# Altium PCB PCB3.PcbDoc (part 2 of 4)
Units mm, origin at the board's own origin, x right, y up, seen from the top; angles counter-clockwise.
Board outline 160 x 194 mm, 2 copper layers (Top Layer, Bottom Layer); 456 components, 297 nets, 1240 pads, 521 vias.
Unrouted connection lines stored in the file: 258.
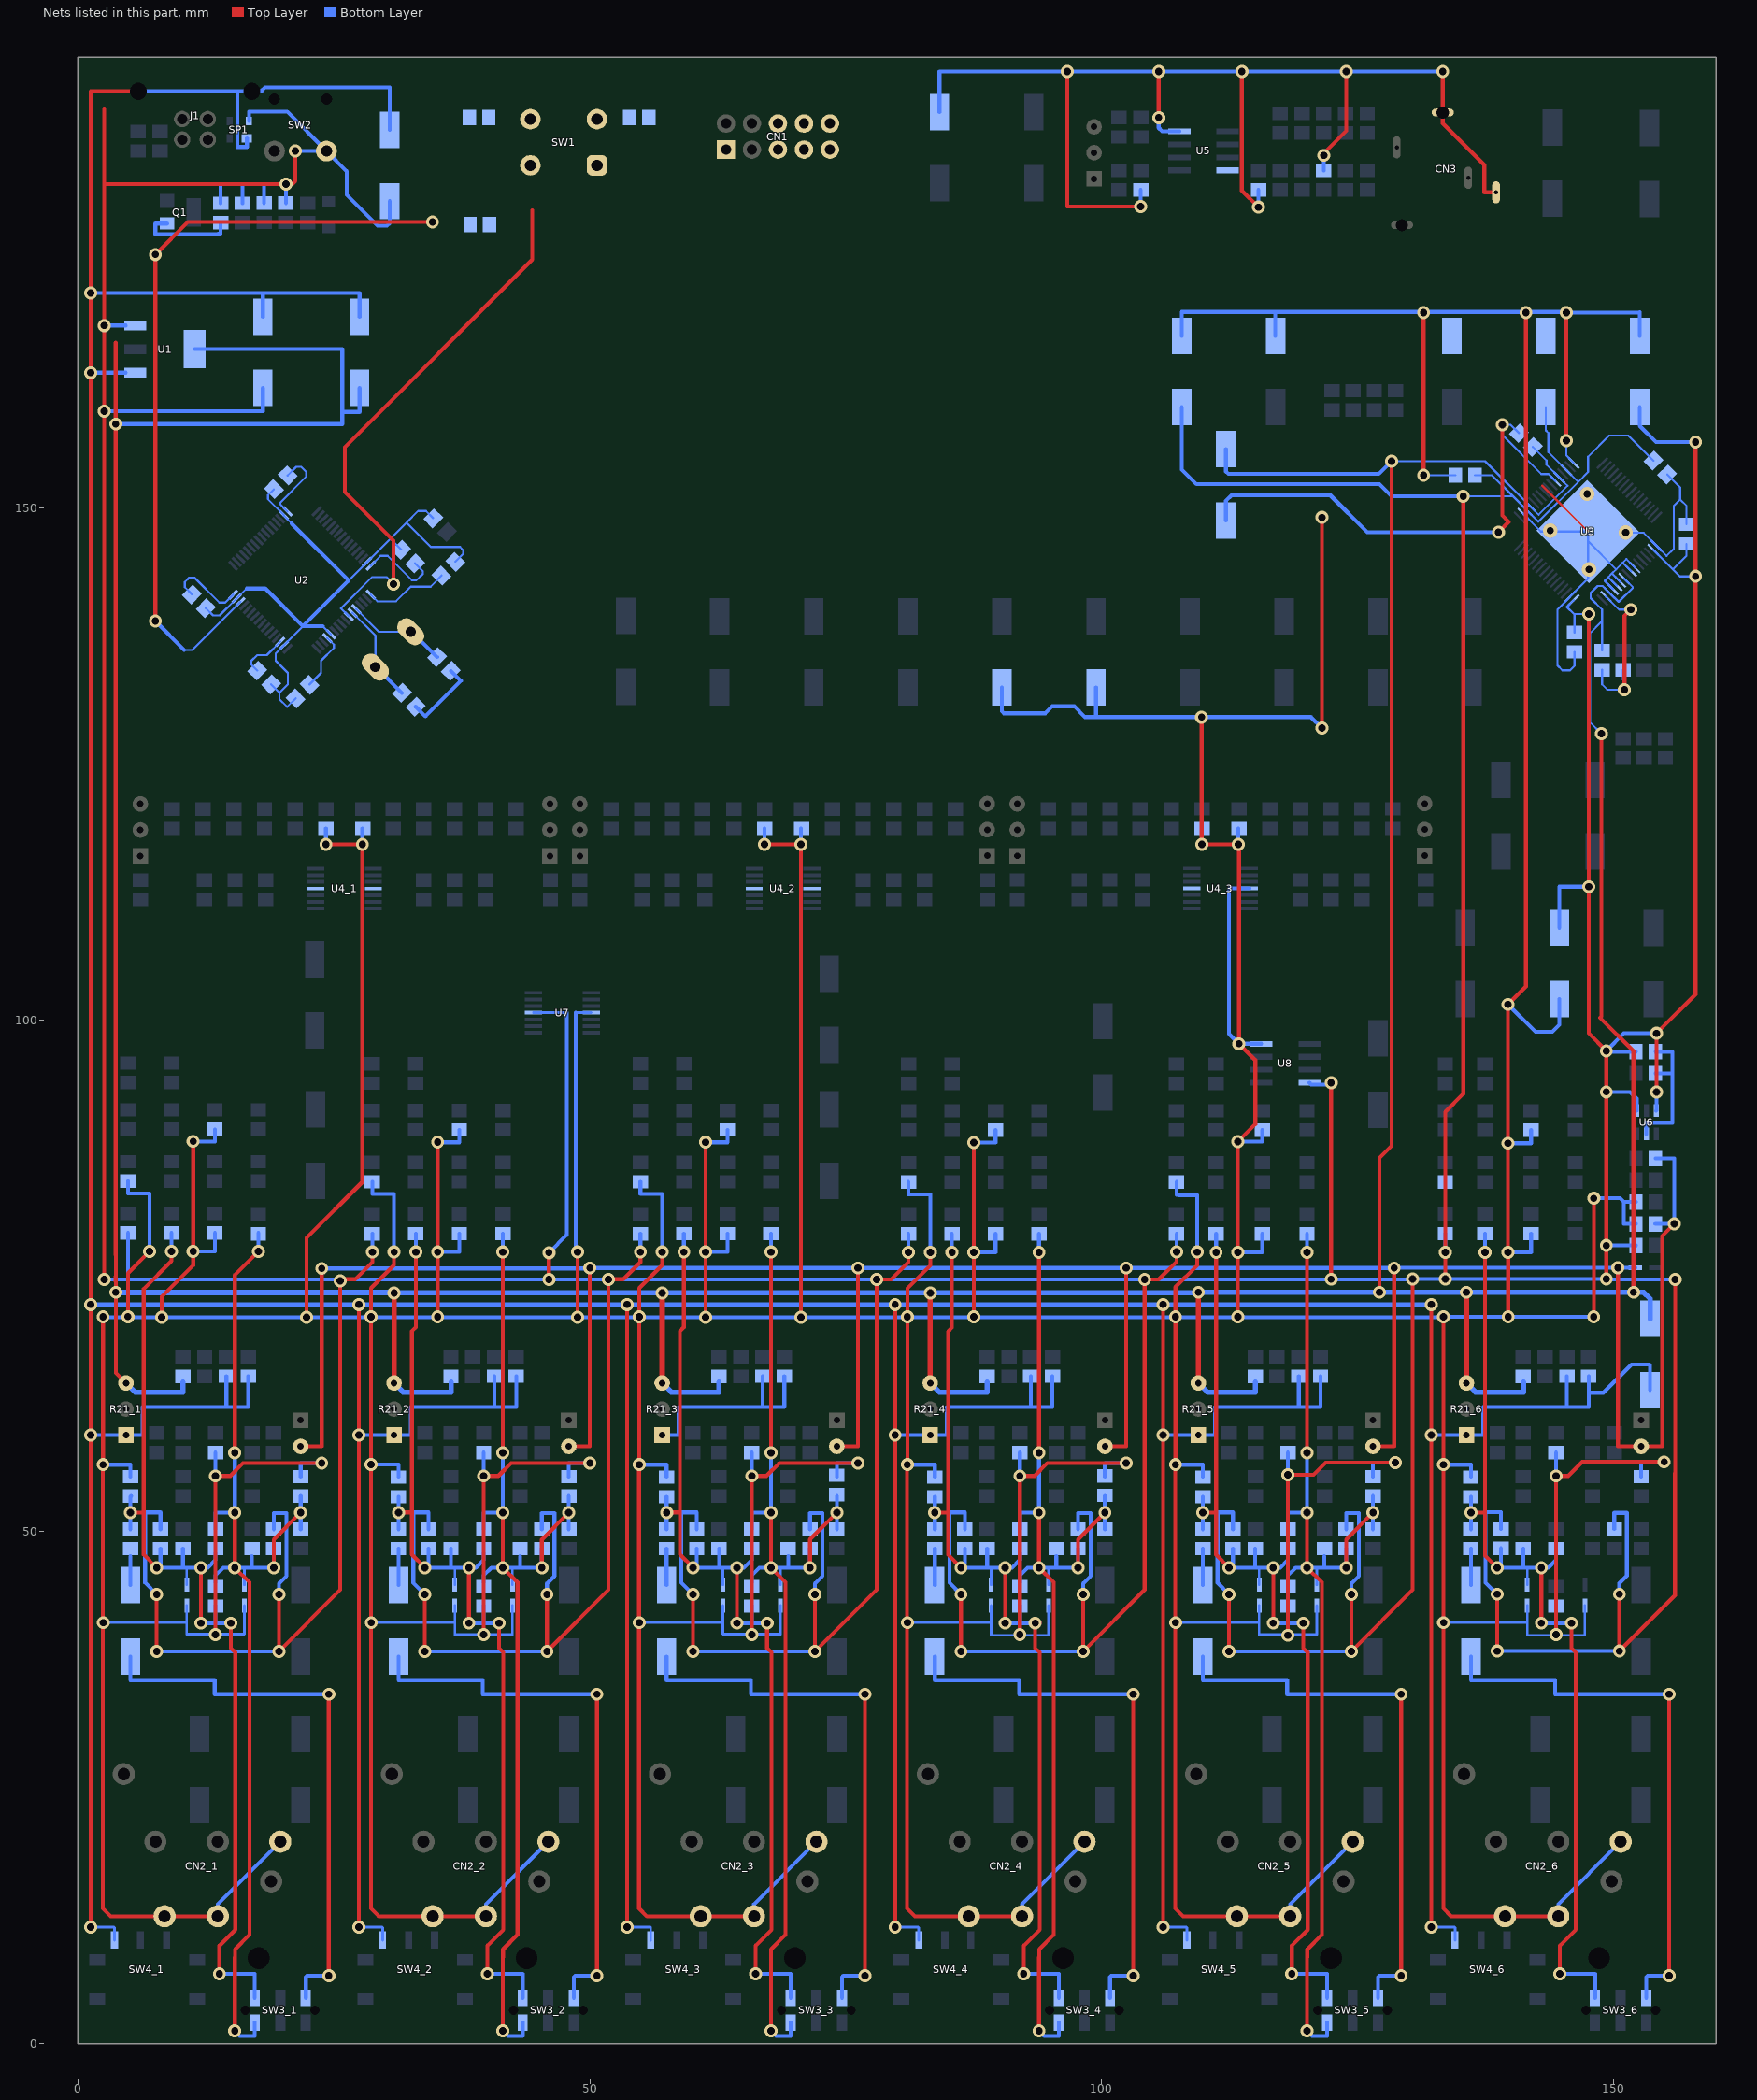
[diagram p2: the nets of this part, all layers, seen from the top]

## Part data
B1: "Conecta distintos planos de masa por una pista"
C3 C4 C5 C6 C7 C8 C9 C10 C11 C12 C13 C15 C17_1 C17_2 C17_3 C17_4 C17_5 C17_6 C21 C22 C25 C26 C29 C30 C49_1 C49_2 C49_3 C49_4 C49_5 C49_6 C50_1 C50_2 C50_3 C50_4 C50_5 C50_6 C51_1 C51_2 C51_3 C52_1 C52_2 C52_3 C53_1 C53_2 C53_3 C54_1 C54_2 C54_3 C55_1 C55_2 C55_3 C56_1 C56_2 C56_3 C59_1 C59_2 C59_3 C60_1 C60_2 C60_3 C61 C63 C66 C68 C69 C70 C71 C72 C73 C74 C75 C76 C77 C78 C79 C80 C81 C82 C83 C84 C85 C86 C87 C88 C89_1 C89_2 C89_3 C89_4 C89_5 C89_6 C90_1 C90_2 C90_3 C90_4 C90_5 C90_6 C91_1 C91_2 C91_3 C91_4 C91_5 C91_6 C92_1 C92_2 C92_3 C92_4 C92_5 C92_6 C93_1 C93_2 C93_3 C93_4 C93_5 C93_6: "Capacitor de placas paralelas", tolerancia=X7R, Encapsulado=0805, tension=25V, Valor=100nF
CN1: "STLINK V2 Mini"
D1: library part Led, Color=Verde, Cod. Proveedor=67-1549-1-ND, Encapsulado=SMD, Link=https://www.digikey.com/product-detail/es/SML-LX0603GW-TR/67-1549-1-ND/304360?utm_campaign=buynow&WT.z_cid=ref_octopart_dkc_buynow&utm_medium=aggregator&curr=usd&site=us&utm_source=octopart, Proveedor=Digi-Key
D2 D3_1 D3_2 D3_3 D3_4 D3_5 D3_6 D4_1 D4_2 D4_3 D4_4 D4_5 D4_6: library part "Schottky Diode", Cod. Proveedor=1727-5845-1-ND, Encapsulado=SOD-128, Fabricante=Nexperia, Link=https://www.digikey.com/product-detail/es/PMEG6010EP,115/1727-5845-1-ND/2697507?utm_campaign=buynow&WT.z_cid=ref_octopart_dkc_buynow&utm_medium=aggregator&curr=usd&site=us&utm_source=octopart, Proveedor=Digi-Key
J1: "Conector micro USB tipo B", Cod. Proveedor=CO4821095, Encapsulado="SMD B TYPE SIDE ENTRY", Proveedor=Elemon
L1: library part Inductor, Cod. Proveedor=478-7137-1-ND, Encapsulado=SMD, Fabricante="AVX Corporation", Link=https://www.digikey.com/product-detail/es/L0201R68AHSTR/500/478-7137-1-ND/3455469?utm_campaign=buynow&WT.z_cid=ref_octopart_dkc_buynow&utm_medium=aggregator&curr=usd&site=us&utm_source=octopart, Proveedor=Digi-Key, Valor=0.68nH
Q1: library part NPN, "NPN", Cod. Proveedor=1727-2918-1-ND, Encapsulado=TO-236AB, Fabricante="Nexperia USA Inc.", Link=https://www.digikey.com/products/es?keywords=1727-2918-1-ND, Proveedor=Digi-Key
R1 R8_1 R8_2 R8_3 R8_4 R8_5 R8_6 R9_1 R9_2 R9_3 R9_4 R9_5 R9_6 R10_1 R10_2 R10_3 R10_4 R10_5 R10_6 R24_1 R24_2 R24_3 R25_1 R25_2 R25_3 R26_1 R26_2 R26_3 R27_1 R27_2 R27_3 R28_1 R28_2 R28_3 R29_1 R29_2 R29_3 R30_1 R30_2 R30_3 R31_1 R31_2 R31_3 R34_1 R34_2 R34_3 R35_1 R35_2 R35_3 R36_1 R36_2 R36_3 R37_1 R37_2 R37_3 R38 R39 R40 R41 R42 R43 R44 R45 R46 R47 R48 R50 R75 R78 R81 R82 R83 R84 R85 R86 R87 R88 R89 R92 R93 R94 R95 R96 R97 R98 R99 R100 R103 R104 R105 R106 R107 R108 R109 R110 R111 R114 R115 R116 R117 R118 R119 R120 R121 R122 R125 R126 R127 R128 R129 R130 R131 R132 R133 R136 R137 R138 R139 R140 R141 R142 R143: "Resistencia", tolerancia=10%, Potencia=1/4W
  R1: Valor=10K
  R8_1 R8_2 R8_3 R8_4 R8_5 R8_6 R34_1 R34_2 R34_3 R35_1 R35_2 R35_3 R39 R43 R47 R81 R85 R92 R97 R103 R107 R114 R118 R125 R129 R136 R140: Valor=1K
  R9_1 R9_2 R9_3 R9_4 R9_5 R9_6: Valor=15K
  R10_1 R10_2 R10_3 R10_4 R10_5 R10_6: Valor=8K2
  R24_1 R24_2 R24_3 R25_1 R25_2 R25_3 R28_1 R28_2 R28_3 R29_1 R29_2 R29_3 R30_1 R30_2 R30_3 R31_1 R31_2 R31_3: Valor=1K5
  R26_1 R26_2 R26_3 R27_1 R27_2 R27_3 R36_1 R36_2 R36_3 R37_1 R37_2 R37_3 R84 R95 R106 R117 R128 R139: Valor=47
  R38 R48 R78 R88 R89 R96 R100 R110 R111 R121 R122 R132 R133 R143: Valor=5K6
  R40 R44 R82 R86 R93 R98 R104 R108 R115 R119 R126 R130 R137 R141: Valor=6K8
  R41 R45: Valor=360R
  R42: Valor=4K7
  R46: Valor=47R
  R50: Valor=100R
  R75: Valor=1M
  R83 R87 R94 R99 R105 R109 R116 R120 R127 R131 R138 R142: Valor=360
R2 R3 R4 R5 R6 R7 R11 R22_1 R22_2 R22_3 R22_4 R22_5 R22_6 R23_1 R23_2 R23_3 R23_4 R23_5 R23_6 R51 R52 R53 R54 R55 R56 R57 R58 R59 R60 R61 R62 R63 R64 R65 R66 R67 R68 R69 R70 R71 R72 R73 R74 R76 R77 R79 R80 R90 R91 R101 R102 R112 R113 R123 R124 R134 R135 R144_1 R144_2 R144_3 R144_4 R144_5 R144_6 R145_1 R145_2 R145_3 R145_4 R145_5 R145_6 R146_1 R146_2 R146_3 R146_4 R146_5 R146_6 R147_1 R147_2 R147_3 R147_4 R147_5 R147_6: "Resistencia", tolerancia=5%
  R2: Potencia=1/10W, Valor=330R
  R3: Potencia=1/10W, Valor=47k
  R4 R5 R6 R7: Potencia=1/10W, Valor=22R
  R11: Potencia=1/10W, Valor=220K
  R22_1 R22_2 R22_3 R22_4 R22_5 R22_6 R144_1 R144_2 R144_3 R144_4 R144_5 R144_6 R147_1 R147_2 R147_3 R147_4 R147_5 R147_6: Potencia=1/4W, Valor=1K
  R23_1 R23_2 R23_3 R23_4 R23_5 R23_6: Potencia=1/4W, Valor=15K
  R51 R52 R53 R54 R55 R56 R57 R58 R59 R60 R61 R62 R63 R64 R65 R66 R67 R68 R69 R70 R71 R72 R73 R74 R79 R80 R90 R91 R101 R102 R112 R113 R123 R124 R134 R135: Potencia=1/4W, Valor=1M
  R76: Potencia=1/4W, Valor=33K
  R77: Potencia=1/4W, Valor=1K8
  R145_1 R145_2 R145_3 R145_4 R145_5 R145_6: Potencia=1/4W, Valor=6K8
  R146_1 R146_2 R146_3 R146_4 R146_5 R146_6: Potencia=1/4W, Valor="6 K8"
R12 R13 R14 R15 R16 R17 R18 R19 R20: "Resistencia", Potencia=1/10W, Valor=100R
R21_1 R21_2 R21_3 R21_4 R21_5 R21_6 R32_1 R32_2 R32_3 R33_1 R33_2 R33_3 R49: library part Potenciometer, tolerancia=10%, Potencia=1/4W, Valor=10K
SP1: library part "Double ESD", "Double rail-to-rail ESD protection diode", Cod. Proveedor=1727-3884-1-ND, Encapsulado=SOT-143B, Link=https://www.digikey.com/product-detail/es/PRTR5V0U2X,215/1727-3884-1-ND/1589981?utm_campaign=buynow&WT.z_cid=ref_octopart_dkc_buynow&utm_medium=aggregator&curr=usd&site=us&utm_source=octopart, Proveedor=Digi-Key
SW1 SW5_1 SW5_2 SW5_3 SW5_4 SW5_5 SW5_6: "Pulsador de 4 pines"
  SW5_1 SW5_2 SW5_3 SW5_4 SW5_5 SW5_6: Cod. Proveedor=GH1365-ND, Encapsulado="Montaje en panel, posterior", Fabricante="Grayhill Inc.", Link=https://www.digikey.com/product-detail/es/30-3/GH1365-ND/686796?utm_campaign=buynow&WT.z_cid=ref_octopart_dkc_buynow&utm_medium=aggregator&curr=usd&site=us&utm_source=octopart, Proveedor=Digi-Key
SW4_1 SW4_2 SW4_3 SW4_4 SW4_5 SW4_6: library part SWITCH_3, "Pulsador de 4 pines", Cod. Proveedor=563-1246-1-ND, Encapsulado=SMD, Fabricante="Nidec Copal Electronics", Link=https://www.digikey.com/product-detail/en/nidec-copal-electronics/CFPA-1FB4-A2T/563-1246-1-ND/2357767, Proveedor=Digi-Key
U1: "LDO Regulator", Cod. Proveedor=LM1117IMP-ADJ/NOPBCT-ND, Encapsulado=SOT-223-4, Fabricante="Texas Instruments", Link=https://www.digikey.com/product-detail/es/LM1117IMP-ADJ-NOPB/LM1117IMP-ADJ-NOPBCT-ND/483060?utm_campaign=buynow&WT.z_cid=ref_octopart_dkc_buynow&utm_medium=aggregator&curr=usd&site=us&utm_source=octopart, Proveedor=Digi-Key
U2: library part STM32F4xxR2, Manufacturer=STMicroelectronics, Manufacturer_Part_Number=stm32f4xxr2, _BOOT0="conectado a VDD o DGND a traves de R=10K", _BOOT0=0="0: Main Flash memory is selected as boot space", _BOOT0=1="1: System memory is selected as boot space", _VDD="Capa de 100nF", Cod. Proveedor=497-17428-ND, Encapsulado=64-LQFP, Link=https://www.digikey.com/product-detail/es/STM32F401RBT6/497-17428-ND/4755972?utm_campaign=buynow&WT.z_cid=ref_octopart_dkc_buynow&utm_medium=aggregator&curr=usd&site=us&utm_source=octopart, Proveedor=Digi-Key, Vendor=STMicroelectronics
U3: library part PCM3168A-Q1_PAP_, Manufacturer="Texas Instruments", Manufacturer_Part_Number=PCM3168A-Q1_PAP_64, Vendor="Texas Instruments"
U4_1 U4_2 U4_3 U7: library part Opamp_x4, "Integrado con 4 operacionales", Cod. Proveedor=296-22024-1-ND, Encapsulado=8-SOIC, Fabricante="Texas Instruments", Link=https://www.digikey.com/product-detail/es/OPA2134UA-2K5/296-22024-1-ND/301154?utm_campaign=buynow&WT.z_cid=ref_octopart_dkc_buynow&utm_medium=aggregator&curr=usd&site=us&utm_source=octopart, Proveedor=Digi-Key
U5: "Integrado con 2 operacionales"
U6: "Low IQ Boost/SEPIC/Inverting Converter with 1A, 60V Switch", Cod. Proveedor=LT8330ES6#TRMPBFCT-ND, Encapsulado=TSOT-23-6, Fabricante="Linear Technology/Analog Devices", Link=https://www.digikey.com/product-detail/es/LT8330ES6%2523TRMPBF/LT8330ES6%2523TRMPBFCT-ND/5361671?utm_campaign=buynow&WT.z_cid=ref_octopart_dkc_buynow&utm_medium=aggregator&curr=usd&site=us&utm_source=octopart, Proveedor=Digi-Key
U8: library part Opamp_x2, "Integrado con 2 operacionales", Cod. Proveedor=296-22024-1-ND, Encapsulado=8-SOIC, Fabricante="Texas Instruments", Link=https://www.digikey.com/product-detail/es/OPA2134UA-2K5/296-22024-1-ND/301154?utm_campaign=buynow&WT.z_cid=ref_octopart_dkc_buynow&utm_medium=aggregator&curr=usd&site=us&utm_source=octopart, Proveedor=Digi-Key
Y1: "Resonador cerámico", frecuencia=8MHZ
C1 C2 C14 C16_1 C16_2 C16_3 C16_4 C16_5 C16_6 C18_1 C18_2 C18_3 C18_4 C18_5 C18_6 C19 C20 C23 C24 C27 C28 C31 C32 C33 C34 C35 C36 C37 C38 C39 C40 C41 C42 C43 C44 C45 C46 C47_1 C47_2 C47_3 C47_4 C47_5 C47_6 C48_1 C48_2 C48_3 C48_4 C48_5 C48_6 C57_1 C57_2 C57_3 C58_1 C58_2 C58_3 C62 C64 C65 C67: tension=16V, Valor=10uF
SW2: Cod. Proveedor=EG2615-ND, Encapsulado=SMD, Fabricante=E-Switch, Link=https://www.digikey.com/product-detail/en/e-switch/800SP9B6M6RE/EG2615-ND/502079, Proveedor=Digi-Key
SW3_1 SW3_2 SW3_3 SW3_4 SW3_5 SW3_6: Cod. Proveedor=CKN10722TR-ND, Encapsulado=SMD, Fabricante=C&K, Link=https://www.digikey.com/product-detail/en/c-k/JS202011JAQN/CKN10722TR-ND/6137629, Proveedor=Digi-Key

## Via types
v1: diameter 1.27, hole 0.711, Top Layer to Bottom Layer, 517 vias
v2: diameter 1.4, hole 0.7, Top Layer to Bottom Layer, 4 vias

## Nets (pads, with @x,y where several pads share a name; then routed paths per layer and width w, separated by ;. In a path a pad name is that pad's centre, name@x,y a point inside that pad or via, vN(x,y) a via of type N, cw(c..) or ccw(c..) an arc to the next point about the centre after c; other vN are vias at no path point)
3V3_D: C2.1 C3.1 C4.1 C7.1 C8.1 C9.1 C10.1 C20.1 C22.1 C24.1 C26.1 CN1.7 CN1.8 R21_1.3 R21_2.3 R21_3.3 R21_4.3 R21_5.3 R21_6.3 R22_1.2 R22_2.2 R22_3.2 R22_4.2 R22_5.2 R22_6.2 U1.4 U2.1 U2.13 U2.19 U2.32 U2.48 U2.64 U3.4 U3.12 U3.42 U3.46 | length 639.3
  Top Layer w0.381: 3.687,74.451 3.687,74.911 3.705,74.928 3.705,79.371 3.687,79.388 ; 3.688,74.5 3.688,73.374 3.688,65.517 R21_1.3@4.687,64.518 ; 3.687,77.063 3.688,166.125 ; v1(127.125,73.375) 127.125,86.5 128.312,87.687 v1(128.312,154.563) ; v1(148.812,127.937) 148.812,100.312 148.688,100.187 151.937,96.938 v1(151.937,73.375)
  Top Layer w0.508: R21_2.3@30.875,64.518 v1(30.875,73.313) ; R21_3.3@57.062,64.518 v1(57.062,73.323) ; R21_4.3@83.25,64.518 v1(83.25,73.323) ; R21_5.3@109.437,64.518 v1(109.437,73.375) ; R21_6.3@135.625,64.518 v1(135.625,73.375)
  Bottom Layer w0.203: C8.1@11.141,141.547 10.438,142.25 10.438,142.75 10.875,143.187 11.375,143.187 13.812,140.75 14.386,140.75 U2.32@15.16,141.523 ; C4.1@17.516,134.109 16.937,134.688 16.937,135.062 17.5,135.625 18.454,135.625 U2.19@19.756,136.927 ; U2.48@20.463,149.655 19.75,150.368 19.75,150.5 22.313,153.063 22.313,153.5 21.813,154 21.312,154 C9.1@20.484,153.172 ; C7.1@22.609,132.734 23.75,133.875 23.75,135.063 25,136.313 25,136.633 U2.13@24.352,137.281 ; U2.1@28.595,141.523 29.243,140.875 31.062,140.875 32.5,142.312 34.438,142.312 C3.1@35.516,143.391 ; U2.64@28.595,144.352 29.555,145.313 30.25,145.313 32.625,142.937 33.062,142.937 33.687,143.562 33.687,143.812 C10.1@32.922,144.578 ; v1(128.312,154.563) 137.443,154.563 U3.4@141.861,150.145 142.679,149.326 145.508,152.154 U3.12@144.689,152.973 143.438,154.225 143.438,154.625 C26.1@142.109,155.953 ; v1(148.812,127.937) 147.687,129.062 147.687,137.75 148.812,138.875 ; C22.1@148.875,136.075 148.875,140.063 147.75,141.188 147.75,141.687 148.438,142.375 148.923,142.375 U3.46@149.604,141.695 150.486,140.812 150.5,140.812 151.875,142.188 151.875,142.252 U3.42@151.018,143.109
  Bottom Layer w0.381: v1(3.688,158.188) 25.813,158.188 25.813,159.375 ; U1.4@11.4,165.5 25.813,165.5 25.813,159.375 ; C2.1@27.5,161.708 27.5,159.375 25.813,159.375 ; C24.1@112.125,155.73 112.125,153.562 112.375,153.313 127.062,153.313 v1(128.312,154.563)
  Bottom Layer w0.508: v1(3.688,73.375) 3.706,73.356 30.856,73.356 v1@30.875,73.375 ; R21_1.3@4.687,64.518 5.58,63.625 10.25,63.625 R22_1.2@10.25,64.59 ; R21_2.3@30.875,64.518 31.767,63.625 36.437,63.625 R22_2.2@36.437,64.59 ; v1(30.875,73.313) 30.893,73.33 54.098,73.33 54.106,73.323 v1(57.062,73.323) 57.07,73.331 80.286,73.331 80.293,73.323 v1(83.25,73.323) 83.257,73.331 106.473,73.331 106.481,73.323 v1@109.438,73.323 ; R21_3.3@57.062,64.518 57.955,63.625 62.625,63.625 R22_3.2@62.625,64.59 ; R21_4.3@83.25,64.518 84.142,63.625 88.812,63.625 R22_4.2@88.812,64.59 ; R21_5.3@109.437,64.518 110.33,63.625 115,63.625 R22_5.2@115,64.59 ; v1(109.437,73.375) v1(127.125,73.375) v1(135.625,73.375) v1(151.937,73.375) 152.938,73.375 153.562,72.75 C20.1@153.562,70.792 ; R21_6.3@135.625,64.518 136.517,63.625 141.187,63.625 R22_6.2@141.187,64.59
5V: C1.1 C14.1 C15.1 C19.1 C21.1 C23.1 C25.1 C27.1 C28.1 C29.1 C30.1 C68.1 CN1.9 CN1.10 L1.1 R2.2 R3.2 R4.1 R51.1 R53.1 R55.1 R57.1 R59.1 R61.1 R63.1 R65.1 R67.1 R69.1 R71.1 R73.1 R79.1 R90.1 R101.1 R112.1 R123.1 R134.1 SP1.4 SW2.2 U1.3 U3.3 U3.14 U3.34 U3.49 U4_1.4 U4_2.4 U4_3.4 U5.4 U6.4 U6.6 U7.4 U8.8 | length 1274.8
  Top Layer w0.381: v1(2.562,74.624) v1(2.562,159.437) ; 2.562,188.937 2.562,181.625 ; v1@7.688,38.375 v1(7.688,43.875) ; v1(19.625,43.875) v1(19.625,38.312) 25.625,44.313 v1(25.625,74.499) ; v1(21.232,184.857) 21.232,181.92 20.937,181.625 v1(20.312,181.625) 2.562,181.625 ; v1@25.625,74.65 27.063,74.65 28.75,76.338 v1(28.75,77.312) ; v1@33.875,38.375 v1(33.875,43.875) ; v1(45.812,43.875) v1(45.812,38.312) 51.813,44.313 v1(51.813,74.625) ; v1@45.999,74.499 v1(45.999,74.625) v1(45.999,77.249) ; v1@51.813,74.65 53.25,74.65 54.938,76.338 v1(54.938,77.312) ; v1@60.062,38.375 v1(60.062,43.875) ; v1(72,43.875) v1(72,38.312) 78,44.313 v1(78,74.625) 79.437,74.625 81.125,76.312 v1(81.125,77.287) ; v1@86.25,38.375 v1(86.25,43.875) ; v1(98.187,43.875) v1(98.187,38.312) 104.188,44.313 v1(104.188,74.625) 105.562,74.625 107.309,76.372 v1(107.309,77.316) ; v1@112.375,38.312 112.437,38.375 v1(112.437,43.875) ; v1(122.407,74.657) v1(122.407,93.845) ; v1(124.375,43.875) v1(124.375,38.312) 130.375,44.313 v1(130.375,74.687) ; v1(133.563,74.688) v1(133.563,77.287) 133.563,91 135.313,92.75 v1(135.313,151.125) ; v1@138.625,38.395 v1(138.625,43.895) ; v1(147.562,139.625) v1(147.562,113) 147.562,98.674 v1(149.284,96.952) v1(149.284,92.952) v1(149.284,74.688) v1@149.284,74.341 ; v1(150.562,43.895) v1(150.562,38.333) 156,43.77 156,55.688 156.017,55.705 156.017,74.608 v1(156,74.625) ; v1@154.173,92.952 v1(154.188,92.937) v1(154.188,98.674) 158,102.487 v1(158,143.313) v1(158,156.423) ; v1(2.562,159.437) v1@2.562,167.375 ; v1(2.562,159.437) v1@2.562,167.375 ; v1@2.562,167.375 v1(2.562,167.812) 2.562,181.625
  Bottom Layer w0.203: v1(135.313,151.125) 140.173,151.125 ; C25.1@136.45,153.187 138.111,153.187 140.173,151.125 ; C27.1@143.375,159.833 143.375,157.563 143.625,157.312 143.625,155.452 U3.14@145.396,153.68 146.538,152.538 ; U3.49@146.103,140.988 145.437,140.322 146.134,139.625 ; C29.1@146.188,137.825 146.188,139.572 146.134,139.625 ; v1(147.562,139.625) 146.134,139.625 ; U3.34@153.846,145.937 155.784,144 ; C30.1@153.891,154.609 151.438,157.063 149.562,157.063 147.5,155 147.5,153.5 146.538,152.538 ; C21.1@157.125,146.487 157.125,145.341 155.784,144 ; v1(158,143.313) 156.471,143.313 155.784,144 ; 140.173,151.125 U3.3@141.507,149.791 142.649,148.649 146.538,152.538
  Bottom Layer w0.254: U7.4@44.493,100.687 47.75,100.687
  Bottom Layer w0.381: v1(2.562,74.624) 3.542,74.624 3.543,74.625 4.875,74.625 ; v1(2.562,159.437) 3.125,159.437 18.062,159.437 C1.1@18.062,161.708 ; v1(2.562,167.812) 4.65,167.812 U1.3@4.662,167.8 ; R79.1@4.875,79.175 4.875,74.625 ; v1(7.688,38.312) v1(19.625,38.312) ; v1(7.688,43.875) 6.563,45 6.563,51.875 8.063,51.875 R51.1@8.063,50.242 ; C15.1@13.938,179.763 13.938,181.625 16.062,181.625 ; R3.2@16.062,179.763 16.062,181.625 ; SP1.4@16.7,187.788 16.7,188.687 20.438,188.687 SW2.2@24.268,184.857 ; R4.1@18.185,179.78 18.185,181.625 ; R53.1@19.125,50.242 19.125,51.812 20.353,51.812 20.353,45.665 19.625,44.937 v1(19.625,43.875) ; R2.2@20.31,179.78 20.312,179.783 v1(20.312,181.625) 18.185,181.625 ; v1(21.232,184.857) SW2.2@24.268,184.857 ; v1(25.625,74.499) v1@25.625,74.625 ; v1(28.75,77.312) R90.1@28.75,79.112 ; C14.1@30.438,179.958 30.438,177.812 30.188,177.562 29.25,177.562 26.25,180.563 26.25,182.875 SW2.2@24.268,184.857 ; v1(33.875,38.312) v1(45.812,38.312) ; v1(33.875,43.875) 32.75,45 32.75,51.875 34.25,51.875 R55.1@34.25,50.242 ; R57.1@45.313,50.242 45.313,51.812 46.54,51.812 46.54,45.665 45.812,44.937 v1(45.812,43.875) ; v1(45.999,77.249) 47.75,79 47.75,100.687 ; v1(54.938,77.312) R101.1@54.938,79.112 ; v1(60.062,38.312) v1(72,38.312) ; v1(60.062,43.875) 58.937,45 58.937,51.875 60.437,51.875 R59.1@60.437,50.242 ; R61.1@71.5,50.242 71.5,51.812 72.728,51.812 72.728,45.665 72,44.937 v1(72,43.875) ; v1(81.125,77.287) R112.1@81.125,79.087 ; v1(86.25,38.312) v1(98.187,38.312) ; v1(86.25,43.875) 85.125,45 85.125,51.875 86.625,51.875 R63.1@86.625,50.242 ; R65.1@97.688,50.242 97.688,51.812 98.915,51.812 98.915,45.665 98.187,44.937 v1(98.187,43.875) ; v1(107.309,77.316) R123.1@107.309,79.087 ; C28.1@107.812,159.833 107.812,153.75 109.25,152.312 127.125,152.312 128.313,151.125 v1(135.313,151.125) ; v1@112.375,38.312 v1(112.437,38.312) v1(124.375,38.312) ; v1(112.437,43.875) 111.313,45 111.313,51.875 112.812,51.875 R67.1@112.812,50.242 ; U8.8@120.3,93.845 120.467,93.678 122.24,93.678 v1(122.407,93.845) ; v1@122.375,74.621 26.518,74.621 26.515,74.625 v1@25.625,74.625 ; v1@122.407,74.621 v1@130.375,74.621 ; R69.1@123.875,50.242 123.875,51.812 125.103,51.812 125.103,45.665 124.375,44.937 v1(124.375,43.875) ; v1(130.375,74.687) v1(149.284,74.688) 149.347,74.625 v1(156,74.625) ; v1(133.563,77.287) R134.1@133.563,79.112 ; v1(138.625,38.333) v1(150.562,38.333) ; v1(138.625,43.895) 137.5,45.02 137.5,51.895 139,51.895 R71.1@139,50.263 ; C19.1@144.688,108.98 144.688,113 v1(147.562,113) ; v1(149.284,77.952) 152.16,77.952 L1.1@152.175,77.937 ; v1(149.284,92.952) 151.587,92.952 152.25,92.289 U6.4@152.25,91.125 ; v1(149.284,96.952) 151.006,98.674 v1(154.188,98.674) ; v1@149.347,96.89 C68.1@152.187,96.89 ; R73.1@150.063,50.263 150.063,51.833 151.29,51.833 151.29,45.686 150.562,44.958 v1(150.562,43.895) ; C23.1@152.562,159.833 152.562,158 154.139,156.423 v1(158,156.423) ; U6.6@154.15,91.125 154.188,91.162 v1(154.188,92.937) ; 4.875,74.625 11.5,74.625 11.515,74.64 11.515,74.625 v1@25.625,74.625 ; 16.062,181.625 18.185,181.625
48V: C69.1 D2.1 R75.2 SW5_1.2 SW5_2.2 SW5_3.2 SW5_4.2 SW5_5.2 SW5_6.2 | length 279.7
  Top Layer w0.381: SW5_1.2@21.75,58.335 23.812,58.335 v1(23.812,75.704) ; SW5_2.2@47.937,58.335 50,58.335 v1(50,75.75) ; SW5_3.2@74.125,58.335 76.188,58.335 v1(76.188,75.75) ; SW5_4.2@100.312,58.335 102.375,58.335 v1(102.375,75.75) ; SW5_5.2@126.5,58.335 128.563,58.335 v1(128.563,75.75) ; v1(150.423,75.765) 150.423,58.335 SW5_6.2@152.688,58.335 154.75,58.335 154.75,78.875 v1(155.938,80.062)
  Bottom Layer w0.381: v1(23.812,75.704) v1@50,75.704 ; v1(50,75.75) v1(76.188,75.75) v1(102.375,75.75) v1(128.563,75.75) 128.58,75.767 150.375,75.767 v1@150.423,75.815 ; v1(150.423,75.765) D2.1@152.115,75.765 ; C69.1@154.075,80.062 v1(155.938,80.062) 155.938,86.449 R75.2@154.087,86.449
AGND: B1.1 C19.2 C21.2 C23.2 C25.2 C27.2 C28.2 C29.2 C30.2 C31.2 C32.2 C35.2 C36.2 C59_1.2 C59_2.2 C59_3.2 C60_1.2 C60_2.2 C60_3.2 C66.2 C67.2 C68.2 C69.2 C70.2 C73.2 C77.2 C79.2 C82.2 C85.2 C88.2 C91_1.2 C91_2.2 C91_3.2 C91_4.2 C91_5.2 C91_6.2 CN2_1.1 CN2_1.G CN2_1.S CN2_2.1 CN2_2.G CN2_2.S CN2_3.1 CN2_3.G CN2_3.S CN2_4.1 CN2_4.G CN2_4.S CN2_5.1 CN2_5.G CN2_5.S CN2_6.1 CN2_6.G CN2_6.S CN3.1 CN3.2 D3_1.2 D3_2.2 D3_3.2 D3_4.2 D3_5.2 D3_6.2 D4_1.2 D4_2.2 D4_3.2 D4_4.2 D4_5.2 D4_6.2 R47.1 R48.1 R52.2 R54.2 R56.2 R58.2 R60.2 R62.2 R64.2 R66.2 R68.2 R70.2 R72.2 R74.2 R77.1 R80.2 R88.1 R91.2 R100.1 R102.2 R110.1 R113.2 R121.1 R124.2 R132.1 R135.2 R143.1 U3.2 U3.16 U3.33 U3.39 U3.40 U3.43 U3.44 U3.45 U3.50 U3.EPAD U4_1.11 U4_2.11 U4_3.11 U5.8 U6.2 U7.11 U8.4 | length 1836.8
  Top Layer w0.381: v1@2.428,41.105 2.428,13.197 3.197,12.428 CN2_1.S@8.453,12.428 CN2_1.G@13.66,12.428 ; v1@2.428,41.125 v1@2.428,56.542 ; v1(2.448,56.542) v1(2.448,70.989) ; v1(4.875,71) 4.875,75.25 v1(7,77.375) ; v1(8.187,70.938) 8.187,72.937 11.25,76 v1(11.25,77.375) v1(11.25,88.125) ; v1(13.437,39.937) v1(13.437,55.437) ; v1(13.437,55.437) 14.875,55.437 16.125,56.687 v1(23.812,56.687) ; v1(22.313,70.938) 22.313,78.688 27.778,84.153 v1(27.778,117.125) v1(24.216,117.125) ; v1@28.615,41.105 28.615,13.197 29.385,12.428 CN2_2.S@34.64,12.428 CN2_2.G@39.847,12.428 ; v1@28.615,41.125 v1@28.615,56.542 ; v1(28.625,56.563) v1@28.625,70.625 ; v1@28.636,70.702 28.636,73.786 30.875,76.025 v1(30.875,77.312) ; v1(35.125,70.989) v1(35.125,77.312) v1(35.125,88.062) ; v1(39.625,39.937) v1(39.625,55.437) ; v1(39.625,55.437) 41.062,55.437 42.312,56.687 v1(50,56.687) ; v1(48.813,70.938) v1(48.813,77.312) ; v1@54.803,41.105 54.803,13.197 55.572,12.428 CN2_3.S@60.828,12.428 CN2_3.G@66.035,12.428 ; v1@54.803,41.125 v1@54.803,56.542 ; v1(54.823,56.542) v1@54.823,70.677 ; v1@54.823,70.702 54.823,73.786 57.063,76.025 v1(57.063,77.312) ; v1(61.313,70.938) v1(61.313,77.312) v1(61.313,88.037) ; v1(65.812,39.937) v1(65.812,55.437) ; v1(65.812,55.437) 67.25,55.437 68.5,56.687 v1(76.188,56.687) ; v1(67.063,117.125) v1(70.625,117.125) v1(70.625,70.938) ; v1@80.99,41.105 80.99,13.197 81.76,12.428 CN2_4.S@87.015,12.428 CN2_4.G@92.222,12.428 ; v1@80.99,41.125 v1@80.99,56.542 ; v1(81.011,56.542) 81.011,73.761 83.25,76 v1(83.25,77.287) ; v1@87.5,70.688 v1(87.5,77.287) v1(87.5,88.012) ; v1(92,39.937) v1(92,55.437) ; v1(92,55.437) 93.437,55.437 94.687,56.687 v1(102.375,56.687) ; v1(96.625,192.625) 96.625,179.437 v1(103.812,179.437) ; v1(105.562,188.125) v1(105.562,192.625) ; v1@107.178,41.105 107.178,13.197 107.947,12.428 CN2_5.S@113.203,12.428 CN2_5.G@118.41,12.428 ; v1@107.178,41.125 v1@107.178,56.542 ; v1(107.198,56.542) 107.198,73.885 109.312,76 v1(109.312,77.312) ; v1(109.75,129.562) 109.75,117.222 109.813,117.159 v1(109.791,117.138) v1(113.354,117.138) 113.405,117.086 v1(113.405,97.655) 115,96.06 115,89.801 v1(113.299,88.1) v1(113.299,77.287) v1@113.299,70.639 ; v1(113.687,192.625) 113.687,181 v1(115.312,179.375) ; v1@118.187,39.937 118.187,55.562 120.688,55.562 121.875,56.75 v1(128.687,56.75) ; v1(121.5,128.5) v1(121.5,149.063) ; v1(121.687,184.435) 121.687,184.626 123.875,186.814 v1(123.875,192.625) ; v1(131.436,169.06) 131.436,153.189 v1(131.437,153.187) ; v1(133.312,192.625) CN3.1@133.312,188.618 133.312,187.563 137.375,183.5 137.375,180.821 CN3.2@138.519,180.821 ; v1@133.365,41.105 133.365,13.197 134.135,12.428 CN2_6.S@139.39,12.428 CN2_6.G@144.597,12.428 ; v1@133.365,41.125 v1@133.365,56.542 ; v1(133.385,56.542) v1@133.385,70.677 ; v1(139.688,77.287) v1(139.688,87.938) v1(139.688,101.5) 141.436,103.248 v1(141.436,169.06) ; v1@139.698,70.677 v1(139.698,70.989) v1@139.698,77.188 ; v1(144.375,39.937) v1@144.375,55.437 ; v1(144.375,55.437) 145.562,55.437 146.937,56.813 v1(154.938,56.813) ; v1(145.373,169.06) v1(145.375,156.563) v1(145.375,156.563) ; v1(148.052,70.989) 148.063,71 v1(148.063,82.562)
  Bottom Layer w0.203: v1(131.437,153.187) C25.2@134.55,153.187 ; U3.2@141.154,149.438 142.904,147.687 U3.EPAD@147.5,147.687 U3.EPAD@147.5,146.744 ; v1(145.375,156.563) 145.375,155.116 U3.16@146.103,154.387 ; C29.2@146.188,135.925 146.188,134.562 145.75,134.125 145,134.125 144.52,134.605 144.52,140.062 145.75,141.292 U3.50@145.75,141.341 147.5,143.091 U3.EPAD@147.5,146.744 ; U3.45@149.957,142.048 149.125,142.881 149.469,143.224 ; U3.44@150.311,142.402 149.488,143.224 149.469,143.224 ; U3.43@150.664,142.755 149.852,143.568 149.812,143.568 ; v2(151.182,147.598) 151.217,147.562 152.928,147.562 U3.33@154.2,146.291 155.178,145.313 155.875,146.009 155.875,150.188 156.5,150.813 ; U3.40@151.725,143.816 150.911,144.631 150.875,144.631 ; U3.39@152.079,144.17 151.246,145.002 150.875,144.631 ; C30.2@155.234,153.266 156.5,152 156.5,150.813 ; C21.2@157.125,148.388 157.125,150.187 156.5,150.813 ; U3.EPAD@147.5,146.744 150.244,144 ; 149.469,143.224 149.812,143.568 ; 149.812,143.568 150.244,144 ; 150.244,144 150.875,144.631
  Bottom Layer w0.254: v1(2.458,41.105) 10.625,41.105 ; D3_1.2@10.625,42.77 10.625,41.105 ; D4_1.2@16.25,42.77 16.25,40 13.438,40 10.625,40 10.625,41.105 ; v1(28.645,41.105) 36.812,41.105 ; D3_2.2@36.812,42.77 36.812,41.105 ; D4_2.2@42.437,42.77 42.437,39.937 36.812,39.937 36.812,41.105 ; 48.625,100.687 U7.11@50.132,100.687 ; v1(54.833,41.105) 63,41.105 ; D3_3.2@63,42.77 63,41.105 ; D4_3.2@68.625,42.77 68.625,40 63,40 63,41.105 ; v1(81.02,41.105) 89.188,41.105 ; D3_4.2@89.188,42.77 89.188,41.105 ; D4_4.2@94.813,42.77 94.813,39.875 89.188,39.875 89.188,41.105 ; v1(107.208,41.105) 115.375,41.105 ; D3_5.2@115.375,42.77 115.375,41.105 ; D4_5.2@121,42.77 121,39.937 115.375,39.937 115.375,41.105 ; v1(133.395,41.105) 141.562,41.105 ; D3_6.2@141.563,42.77 141.562,41.105 ; D4_6.2@147.188,42.77 147.188,39.875 141.562,39.875 141.562,41.105
  Bottom Layer w0.381: v1(2.448,56.542) 5.125,56.542 R52.2@5.125,55.38 ; v1@2.448,70.938 v1(8.187,70.938) v1(22.313,70.938) v1(48.813,70.938) v1(61.313,70.938) v1(70.625,70.938) v1@133.385,70.938 ; R80.2@4.875,84.237 4.875,83.037 7,83.037 v1@7,77.463 ; v1(11.25,77.375) 13.375,77.375 R88.1@13.375,79.175 ; v1@11.25,88.1 13.375,88.1 C73.2@13.375,89.3 ; v1(13.437,39.937) v1@13.438,40 ; v1(13.437,55.437) C91_1.2@13.437,57.73 ; CN2_1.G@13.66,12.428 13.66,13.622 CN2_1.1@19.756,19.718 ; R54.2@21.75,55.38 21.75,56.687 v1(23.812,56.687) ; v1(24.216,117.125) C59_1.2@24.216,118.675 ; v1(27.778,117.125) C60_1.2@27.778,118.675 ; v1(28.625,56.563) 31.292,56.563 31.313,56.542 R56.2@31.313,55.38 ; R91.2@28.75,84.175 28.75,82.975 30.875,82.975 v1@30.875,77.4 ; v1(35.125,77.312) 37.25,77.312 R100.1@37.25,79.112 ; v1@35.125,88.037 37.25,88.037 C77.2@37.25,89.237 ; v1(39.625,55.437) C91_2.2@39.625,57.73 ; CN2_2.G@39.847,12.428 39.847,13.622 CN2_2.1@45.943,19.718 ; R58.2@47.937,55.38 47.937,56.687 v1(50,56.687) ; 48.625,100.687 48.625,77.5 v1(48.813,77.312) ; v1(54.823,56.542) 57.5,56.542 R60.2@57.5,55.38 ; R102.2@54.938,84.175 54.938,82.975 57.063,82.975 v1@57.063,77.4 ; v1(61.313,77.312) 63.438,77.312 R110.1@63.438,79.112 ; v1(61.313,88.037) 63.438,88.037 C79.2@63.438,89.237 ; v1(65.812,55.437) C91_3.2@65.812,57.73 ; CN2_3.G@66.035,12.428 66.035,13.622 CN2_3.1@72.131,19.718 ; v1(67.063,117.125) C59_2.2@67.063,118.675 ; v1(70.625,117.125) C60_2.2@70.625,118.675 ; R62.2@74.125,55.38 74.125,56.687 v1(76.188,56.687) ; v1(81.011,56.542) 83.688,56.542 R64.2@83.688,55.38 ; R113.2@81.125,84.15 81.125,82.95 83.25,82.95 v1@83.25,77.375 ; C67.2@84.152,188.667 84.152,192.625 v1(96.625,192.625) v1(105.562,192.625) v1(113.687,192.625) v1(123.875,192.625) v1(133.312,192.625) ; v1(87.5,77.287) 89.625,77.287 R121.1@89.625,79.087 ; v1(87.5,88.012) 89.625,88.012 C82.2@89.625,89.212 ; C36.2@90.25,132.458 90.25,130.125 90.438,129.937 94.5,129.937 95.187,130.625 97.313,130.625 98.375,129.562 99.438,129.562 ; v1(92,55.437) C91_4.2@92,57.73 ; CN2_4.G@92.222,12.428 92.222,13.622 CN2_4.1@98.318,19.718 ; C32.2@99.438,132.458 99.438,129.562 ; R66.2@100.312,55.38 100.312,56.687 v1(102.375,56.687) ; v1(103.812,179.437) R47.1@103.812,181.05 ; v1(105.562,188.125) 105.562,187.125 105.907,186.78 U5.8@107.575,186.78 ; v1(107.198,56.542) 109.875,56.542 R68.2@109.875,55.38 ; R124.2@107.309,84.15 107.309,82.885 107.572,82.885 107.582,82.875 109.312,82.875 v1(109.312,77.312) ; C28.2@107.812,166.792 107.812,169.147 116.938,169.147 ; v1(109.791,117.138) C59_3.2@109.791,118.688 ; v1(113.299,77.287) 115.674,77.287 R132.1@115.674,79.087 ; v1(113.299,88.1) 115.674,88.1 C85.2@115.674,89.212 ; v1(113.354,117.138) C60_3.2@113.354,118.688 ; U4_3.11@114.423,112.825 112.437,112.825 112.437,98.623 v1(113.405,97.655) U8.4@115.575,97.655 ; v1(115.312,179.375) C66.2@115.312,181.05 ; C31.2@116.938,166.792 116.938,169.147 ; v1(118.188,55.562) C91_5.2@118.188,57.73 ; CN2_5.G@118.41,12.428 118.41,13.622 CN2_5.1@124.506,19.718 ; v1(121.5,128.5) 120.438,129.562 v1(109.75,129.562) 99.438,129.562 ; v1(121.687,184.435) R48.1@121.687,182.95 R48.1@121.687,182.95 ; R70.2@126.5,55.38 126.5,56.75 v1(128.687,56.75) ; v1(133.385,56.542) 136.062,56.542 R72.2@136.062,55.38 ; v1(133.385,70.989) v1(139.698,70.989) v1(148.052,70.989) ; v1(139.688,77.287) 141.938,77.287 R143.1@141.938,79.112 ; v1(139.688,87.938) 141.938,87.938 C88.2@141.938,89.212 ; v1(139.688,101.5) 142.375,98.812 144,98.812 144.688,99.5 C19.2@144.688,102.02 ; v1(144.375,55.437) C91_6.2@144.375,57.73 ; CN2_6.G@144.597,12.428 144.597,13.622 CN2_6.1@150.693,19.718 ; v1(145.373,169.06) 152.498,169.06 152.562,169.125 C23.2@152.562,166.792 ; v1@145.375,169.147 116.938,169.147 ; v1(148.063,82.562) 150.64,82.562 151,82.202 ; C69.2@152.175,80.062 151,80.062 151,82.202 ; R77.1@152.187,82.202 151,82.202 ; R74.2@152.687,55.38 152.687,56.813 v1(154.938,56.813) ; U6.2@153.2,88.839 153.2,89.925 155.737,89.925 155.737,94.75 ; C70.2@154.087,94.765 155.723,94.765 155.737,94.75 ; C68.2@154.087,96.89 155.737,96.89 155.737,94.75
  other v1: 118.188,39.875 28.625,70.989 54.823,70.989 81.011,70.989 87.5,70.989 107.198,70.989 113.299,70.989
  other v2: 147.59,144.006 143.818,147.777 147.41,151.369
DGND: B1.2 C1.2 C2.2 C3.2 C4.2 C5.1 C6.1 C7.2 C8.2 C9.2 C10.2 C11.2 C12.2 C13.2 C14.2 C15.2 C20.2 C22.2 C24.2 C26.2 C49_1.2 C49_2.2 C49_3.2 C49_4.2 C49_5.2 C49_6.2 C50_1.2 C50_2.2 C50_3.2 C50_4.2 C50_5.2 C50_6.2 CN1.5 CN1.6 J1.5 J1.6 Q1.2 R1.1 R11.1 R21_1.1 R21_2.1 R21_3.1 R21_4.1 R21_5.1 R21_6.1 SP1.1 SW1.2 SW4_1.3 SW4_2.3 SW4_3.3 SW4_4.3 SW4_5.3 SW4_6.3 U1.1 U2.12 U2.18 U2.31 U2.47 U2.63 U3.11 U3.47 | length 1029
  Top Layer w0.203: 143,152.187 147.375,147.812
  Top Layer w0.381: v1(1.25,11.375) v1(1.25,59.438) v1(1.25,72.188) v1@1.25,163.075 ; v1(1.25,163.2) v1(1.25,171) 1.25,190.688 J1.6@5.875,190.688 ; v1@1.25,171.012 v1@1.25,163.075 ; v1@1.375,163.2 v1@1.25,163.075 ; v1(27.437,11.375) v1(27.437,59.438) v1(27.437,72.185) ; v1(53.625,11.375) v1(53.625,72.187) ; v1(79.812,11.375) v1(79.812,59.438) v1(79.812,72.188) ; v1(106,11.375) v1(106,59.438) v1(106,72.188) ; v1(132.187,11.375) v1(132.187,59.438) v1(132.187,72.187) ; v1(138.75,147.625) 139.75,148.625 139.125,149.25 v1(139.125,158.125) ; v1(151.061,132.248) 151.061,139.436 v1(151.687,140.063)
  Bottom Layer w0.203: C8.2@12.484,140.203 13.187,139.5 13.843,139.5 U2.31@15.513,141.17 16.468,142.125 ; C4.2@18.859,132.766 19.687,131.938 ; C9.2@19.141,151.828 18.563,151.25 18.563,150.848 U2.47@20.109,149.301 20.109,149.241 20.875,148.475 20.875,148.464 ; C7.2@21.266,131.391 20.437,130.562 19.687,131.311 19.687,131.938 ; 21.973,138.438 U2.18@20.109,136.574 19.312,135.777 19.312,135.063 20.5,133.875 20.5,132.75 19.687,131.938 ; 23.902,138.438 U2.12@24.706,137.634 ; 26.438,142.902 U2.63@28.241,144.705 30.518,146.982 ; C10.2@31.578,145.922 30.518,146.982 ; R1.1@34.703,148.984 34,149.688 33.223,149.688 32.098,148.562 ; C3.2@36.859,144.734 37.625,145.5 37.625,145.875 37.313,146.188 34.473,146.188 32.098,148.562 ; C26.2@140.766,157.297 139.938,158.125 v1(139.125,158.125) 139.125,157.125 142.937,153.313 143.643,153.313 U3.11@144.336,152.62 ; C22.2@148.875,134.175 148.875,132.75 149.377,132.248 v1(151.061,132.248) 151.061,133.064 150.937,133.188 R11.1@150.937,134.175 ; U3.47@149.25,141.341 150.529,140.063 v1(151.687,140.063) ; 30.518,146.982 32.098,148.562
  Bottom Layer w0.254: v1(1.25,11.375) 3.515,11.375 3.57,11.32 SW4_1.3@3.57,10.1 ; v1(27.437,11.375) 29.702,11.375 29.757,11.32 SW4_2.3@29.757,10.1 ; v1(53.625,11.375) 55.89,11.375 55.945,11.32 SW4_3.3@55.945,10.1 ; v1(79.812,11.375) 82.077,11.375 82.132,11.32 SW4_4.3@82.132,10.1 ; v1(106,11.375) 108.265,11.375 108.32,11.32 SW4_5.3@108.32,10.1 ; v1(132.187,11.375) 134.452,11.375 134.507,11.32 SW4_6.3@134.507,10.1
  Bottom Layer w0.381: v1(1.25,59.438) R21_1.1@4.687,59.438 6.312,59.438 6.312,62.188 14.5,62.188 ; v1(1.25,72.188) 2.063,72.188 v1(27.437,72.185) v1@79.812,72.185 ; v1(1.25,163.2) U1.1@4.662,163.2 ; v1(1.25,171) 18.062,171 ; J1.6@5.875,190.688 15.563,190.688 ; Q1.2@8.7,177.775 7.563,177.775 7.563,176.75 13.657,176.75 13.707,176.8 13.938,176.8 C15.2@13.938,177.863 ; C49_1.2@14.5,65.185 14.5,62.188 ; 16.468,142.125 18.286,142.125 21.973,138.438 ; SP1.1@16.5,186.087 16.5,185.25 15.563,185.25 15.563,190.688 ; C50_1.2@16.625,65.185 16.625,62.188 14.5,62.188 ; C1.2@18.062,168.667 18.062,171 ; 20.875,148.464 26.438,142.902 21.973,138.438 ; 23.902,138.438 21.973,138.438 ; v1(27.437,59.438) R21_2.1@30.875,59.438 32.5,59.438 32.5,62.188 40.688,62.188 ; C2.2@27.5,168.667 27.5,171 18.062,171 ; C14.2@30.438,186.917 30.438,191.063 18.25,191.063 17.875,190.688 J1.5@16.975,190.688 15.563,190.688 ; C6.1@32.984,130.578 33.937,129.625 37.406,133.094 C5.1@36.422,134.078 ; C49_2.2@40.688,65.185 40.688,62.188 ; C50_2.2@42.813,65.185 42.813,62.188 40.688,62.188 ; R21_3.1@57.062,59.438 58.687,59.438 58.687,62.188 66.875,62.188 ; C49_3.2@66.875,65.185 66.875,62.188 ; C50_3.2@69,65.185 69,62.188 66.875,62.188 ; v1(79.812,59.438) R21_4.1@83.25,59.438 84.875,59.438 84.875,62.188 93.063,62.188 ; v1(79.812,72.188) v1(106,72.188) v1(132.187,72.187) ; C49_4.2@93.063,65.185 93.063,62.188 ; C50_4.2@95.188,65.185 95.188,62.188 93.063,62.188 ; v1(106,59.438) R21_5.1@109.437,59.438 111.062,59.438 111.062,62.188 119.25,62.188 ; C24.2@112.125,148.77 112.125,150.688 112.687,151.25 122.313,151.25 125.938,147.625 v1(138.75,147.625) ; C49_5.2@119.25,65.185 119.25,62.188 ; C50_5.2@121.375,65.185 121.375,62.188 119.25,62.188 ; v1(132.187,59.438) R21_6.1@135.625,59.438 137.25,59.438 137.25,62.188 145.437,62.188 ; C49_6.2@145.437,65.185 145.437,62.188 ; C50_6.2@147.563,65.185 147.563,63.562 ; C20.2@153.562,63.833 153.562,66.25 153.5,66.312 151.75,66.312 149,63.562 147.563,63.562 ; 145.437,62.188 147.563,62.188 147.563,63.562
NetC5_2: C5.2 U2.5 Y1.1 | length 9.8
  Bottom Layer w0.203: U2.5@27.18,140.109 29.389,137.9 Y1.1@32.5,137.9
  Bottom Layer w0.381: Y1.1@32.5,137.9 32.6,137.9 C5.2@35.078,135.422
NetC6_2: C6.2 U2.6 Y1.2 | length 9.9
  Bottom Layer w0.203: U2.6@26.827,139.756 29.05,137.533 Y1.2@29.05,134.45
  Bottom Layer w0.381: Y1.2@29.05,134.45 29.113,134.45 C6.2@31.641,131.922
NetC11_1: C11.1 C12.1 U2.30 | length 75.9
  Top Layer w0.203: v1(7.562,138.937) 7.75,138.937 v1@7.563,139.125
  Top Layer w0.381: v1@7.563,139.125 v1(7.562,174.75) 10.75,177.938 v1(34.625,177.938)
  Bottom Layer w0.203: 10.375,136.125 11.175,136.125 U2.30@15.867,140.816
  Bottom Layer w0.381: v1(7.562,138.937) 10.375,136.125
NetC13_1: C13.1 CN1.1 SW1.1 U2.7 | length 53.8
  Top Layer w0.381: v1(30.813,142.563) 30.813,146.813 26.063,151.563 26.063,155.938 44.375,174.25 44.375,179.062
  Bottom Layer w0.203: U2.7@26.473,139.402 25.688,140.188 28.75,143.25 30.125,143.25 v1(30.813,142.563)
NetC16_1_1: C16_1.1 R8_1.1 | length 2.8
  Bottom Layer w0.381: C16_1.1@5.125,44.772 5.125,47.592
NetC16_1_2: C16_1.2 SW3_1.1 | length 54.9
  Top Layer w0.381: v1(24.5,6.625) v1(24.5,34.125)
  Bottom Layer w0.381: C16_1.2@5.125,37.812 5.125,35.5 13.359,35.5 13.359,34.125 v1(24.5,34.125) ; SW3_1.1@22.25,4.45 22.25,6.5 22.375,6.625 22.625,6.625 v1(24.5,6.625)
NetC16_2_1: C16_2.1 R8_2.1 | length 3.6
  Bottom Layer w0.381: C16_2.1@31.313,44.772 R8_2.1@31.313,48.342
NetC16_2_2: C16_2.2 SW3_2.1 | length 54.9
  Top Layer w0.381: v1(50.687,6.625) v1(50.687,34.125)
  Bottom Layer w0.381: C16_2.2@31.313,37.812 31.313,35.5 39.547,35.5 39.547,34.125 v1(50.687,34.125) ; SW3_2.1@48.437,4.45 48.437,6.5 48.562,6.625 48.812,6.625 v1(50.687,6.625)
NetC16_3_1: C16_3.1 R8_3.1 | length 3.6
  Bottom Layer w0.381: C16_3.1@57.5,44.772 R8_3.1@57.5,48.342
NetC16_3_2: C16_3.2 SW3_3.1 | length 54.9
  Top Layer w0.381: v1(76.875,6.625) v1(76.875,34.125)
  Bottom Layer w0.381: C16_3.2@57.5,37.812 57.5,35.5 65.734,35.5 65.734,34.125 v1(76.875,34.125) ; SW3_3.1@74.625,4.45 74.625,6.5 74.75,6.625 75,6.625 v1(76.875,6.625)
NetC16_4_1: C16_4.1 R8_4.1 | length 3.6
  Bottom Layer w0.381: C16_4.1@83.688,44.772 R8_4.1@83.688,48.342
NetC16_4_2: C16_4.2 SW3_4.1 | length 54.9
  Top Layer w0.381: v1(103.062,6.625) v1(103.062,34.125)
  Bottom Layer w0.381: C16_4.2@83.688,37.812 83.688,35.5 91.922,35.5 91.922,34.125 v1(103.062,34.125) ; SW3_4.1@100.812,4.45 100.812,6.5 100.937,6.625 101.187,6.625 v1(103.062,6.625)
NetC16_5_1: C16_5.1 R8_5.1 | length 3.6
  Bottom Layer w0.381: C16_5.1@109.875,44.772 R8_5.1@109.875,48.342
NetC16_5_2: C16_5.2 SW3_5.1 | length 54.9
  Top Layer w0.381: v1(129.25,6.625) v1(129.25,34.125)
  Bottom Layer w0.381: C16_5.2@109.875,37.812 109.875,35.5 118.109,35.5 118.109,34.125 v1(129.25,34.125) ; SW3_5.1@127,4.45 127,6.5 127.125,6.625 127.375,6.625 v1(129.25,6.625)
NetC16_6_1: C16_6.1 R8_6.1 | length 3.6
  Bottom Layer w0.381: C16_6.1@136.063,44.772 R8_6.1@136.063,48.342
NetC16_6_2: C16_6.2 SW3_6.1 | length 54.9
  Top Layer w0.381: v1(155.437,6.625) v1(155.437,34.125)
  Bottom Layer w0.381: C16_6.2@136.063,37.812 136.062,35.5 144.297,35.5 144.297,34.125 v1(155.437,34.125) ; SW3_6.1@153.187,4.45 153.187,6.5 153.312,6.625 153.562,6.625 v1(155.437,6.625)
NetC17_1_1: C17_1.1 D3_1.1 R8_1.2 R9_1.2 R51.2 R52.1 R81.1 R144_1.1 SW3_1.3 | length 102.1
  Top Layer w0.381: v1(5.125,51.855) 6.424,51.855 ; v1(7.688,46.48) 6.424,47.744 6.424,51.855 ; v1(9.125,77.375) 9.125,76.438 6.424,73.736 6.424,51.855 ; v1(12,41.063) v1(12,46.48) ; v1(13.812,6.813) 13.812,9.562 15.365,11.115 15.365,38.197 14.938,38.625 v1(14.938,41.063) ; v1@15.365,41.063 v1@15.365,41.105
  Bottom Layer w0.254: D3_1.1@10.625,44.815 10.625,46.48
  Bottom Layer w0.381: R8_1.2@5.125,50.242 v1(5.125,51.855) 5.125,53.417 R52.1@5.188,53.48 ; R51.2@8.063,48.342 8.063,46.855 v1(7.688,46.48) 10.25,46.48 ; v1(9.125,77.375) R81.1@9.125,79.175 ; R144_1.1@10.25,48.342 10.25,46.48 ; v1(12,41.063) 13.437,41.063 ; C17_1.1@13.437,42.717 13.437,41.063 ; R9_1.2@13.437,47.905 13.437,47.23 12.687,46.48 v1(12,46.48) 10.625,46.48 10.25,46.48 ; v1(13.812,6.813) 17.25,6.813 SW3_1.3@17.25,4.45 ; v1(14.938,41.063) 13.437,41.063
NetC17_1_2: C17_1.2 D4_1.1 R9_1.1 R10_1.2 R53.2 R54.1 R85.1 R147_1.1 SW3_1.6 | length 108
  Top Layer w0.381: v1(15.312,1.25) 15.312,8.411 15.329,8.428 15.329,9.205 16.75,10.625 16.75,45.042 v1(15.312,46.48) v1(15.312,51.855) ; v1(15.312,57.687) 15.312,75.062 v1(17.625,77.375) ; v1(19.125,46.48) 19.125,49.23 v1(21.75,51.855)
  Bottom Layer w0.254: D4_1.1@16.25,44.815 16.25,46.48
  Bottom Layer w0.381: C17_1.2@13.437,45.055 13.437,45.73 14.187,46.48 v1(15.312,46.48) 16.25,46.48 17,46.48 ; R9_1.1@13.437,50.242 13.437,51.855 v1(15.312,51.855) v1(15.312,57.687) ; v1(15.312,1.25) 15.812,0.75 17.25,0.75 SW3_1.6@17.25,2.05 ; 17,47.592 17,46.48 ; v1(17.625,77.375) R85.1@17.625,79.175 ; R53.2@19.125,48.342 v1(19.125,46.48) 17,46.48 ; R10_1.2@21.75,50.242 v1(21.75,51.855) R54.1@21.75,53.48
NetC17_2_1: C17_2.1 D3_2.1 R8_2.2 R9_2.2 R55.2 R56.1 R92.1 R144_2.1 SW3_2.3 | length 101
  Top Layer w0.381: v1@31.313,51.88 32.611,51.88 ; v1(33,77.312) 33,69.963 32.611,69.574 32.611,51.88 ; v1@33.875,46.505 32.611,47.769 32.611,51.88 ; v1(38.187,41.063) v1(38.187,46.48) ; v1(40,6.813) 40,9.562 41.553,11.115 41.553,38.197 41.125,38.625 v1(41.125,41.063) ; v1@41.552,41.063 v1@41.552,41.105
  Bottom Layer w0.254: D3_2.1@36.812,44.815 36.812,46.48
  Bottom Layer w0.381: R8_2.2@31.313,50.242 v1(31.313,51.855) R56.1@31.313,53.417 ; v1(33,77.312) R92.1@33,79.112 ; R55.2@34.25,48.342 34.25,46.855 v1(33.875,46.48) 36.437,46.48 ; R144_2.1@36.43,48.342 36.43,46.487 36.437,46.48 ; v1(38.187,41.063) 39.625,41.063 ; C17_2.1@39.625,42.717 39.625,41.063 ; R9_2.2@39.625,47.905 39.625,47.23 38.875,46.48 v1(38.187,46.48) 36.812,46.48 36.437,46.48 ; v1(40,6.813) 43.437,6.813 SW3_2.3@43.437,4.45 ; v1(41.125,41.063) 39.625,41.063
NetC17_2_2: C17_2.2 D4_2.1 R9_2.1 R10_2.2 R57.2 R58.1 R97.1 R147_2.1 SW3_2.6 | length 107
  Top Layer w0.381: v1(41.5,1.25) 41.5,8.411 41.517,8.428 41.517,9.205 42.937,10.625 42.937,45.042 v1(41.5,46.48) v1(41.5,51.855) ; v1@41.5,57.712 v1(41.5,77.312) ; v1(45.313,46.48) 45.313,49.23 v1(47.937,51.855)
  Bottom Layer w0.254: D4_2.1@42.437,44.815 42.437,46.48
  Bottom Layer w0.381: C17_2.2@39.625,45.055 39.625,45.73 40.375,46.48 v1(41.5,46.48) 42.437,46.48 43.188,46.48 ; R9_2.1@39.625,50.242 39.625,51.855 v1(41.5,51.855) v1(41.5,57.687) ; v1(41.5,1.25) 42,0.75 43.437,0.75 SW3_2.6@43.437,2.05 ; v1(41.5,77.312) R97.1@41.5,79.112 ; 43.188,47.592 43.188,46.48 ; R57.2@45.313,48.342 v1(45.313,46.48) 43.188,46.48 ; R10_2.2@47.937,50.242 v1(47.937,51.855) R58.1@47.937,53.48
NetC17_3_1: C17_3.1 D3_3.1 R8_3.2 R9_3.2 R59.2 R60.1 R103.1 R144_3.1 SW3_3.3 | length 101
  Top Layer w0.381: v1@57.5,51.88 58.799,51.88 ; v1(59.188,77.312) 59.188,69.963 58.799,69.574 58.799,51.88 ; v1@60.063,46.505 58.799,47.769 58.799,51.88 ; v1(64.375,41.063) v1(64.375,46.48) ; v1(66.187,6.813) 66.187,9.562 67.74,11.115 67.74,38.197 67.312,38.625 v1(67.312,41.063) ; v1@67.74,41.063 v1@67.74,41.105
  Bottom Layer w0.254: D3_3.1@63,44.815 63,46.48
  Bottom Layer w0.381: R8_3.2@57.5,50.242 v1(57.5,51.855) R60.1@57.5,53.417 ; v1(59.188,77.312) R103.1@59.188,79.112 ; R59.2@60.437,48.342 60.437,46.855 v1(60.062,46.48) 62.625,46.48 ; R144_3.1@62.617,48.342 62.617,46.487 62.625,46.48 ; v1(64.375,41.063) 65.812,41.063 ; C17_3.1@65.812,42.717 65.812,41.063 ; R9_3.2@65.812,47.905 65.812,47.23 65.062,46.48 v1(64.375,46.48) 63,46.48 62.625,46.48 ; v1(66.187,6.813) 69.625,6.813 SW3_3.3@69.625,4.45 ; v1(67.312,41.063) 65.812,41.063
NetC17_3_2: C17_3.2 D4_3.1 R9_3.1 R10_3.2 R61.2 R62.1 R107.1 R147_3.1 SW3_3.6 | length 107
  Top Layer w0.381: v1(67.687,1.25) 67.687,8.411 67.704,8.428 67.704,9.205 69.125,10.625 69.125,45.042 v1(67.687,46.48) v1(67.687,51.855) ; v1@67.688,57.712 v1(67.688,77.312) ; v1(71.5,46.48) 71.5,49.23 v1(74.125,51.855)
  Bottom Layer w0.254: D4_3.1@68.625,44.815 68.625,46.48
  Bottom Layer w0.381: C17_3.2@65.812,45.055 65.812,45.73 66.562,46.48 v1(67.687,46.48) 68.625,46.48 69.375,46.48 ; R9_3.1@65.812,50.242 65.812,51.855 v1(67.687,51.855) v1(67.687,57.687) ; v1(67.687,1.25) 68.187,0.75 69.625,0.75 SW3_3.6@69.625,2.05 ; v1(67.688,77.312) R107.1@67.687,79.112 ; 69.375,47.592 69.375,46.48 ; R61.2@71.5,48.342 v1(71.5,46.48) 69.375,46.48 ; R10_3.2@74.125,50.242 v1(74.125,51.855) R62.1@74.125,53.48
NetC17_4_1: C17_4.1 D3_4.1 R8_4.2 R9_4.2 R63.2 R64.1 R114.1 R144_4.1 SW3_4.3 | length 101
  Top Layer w0.381: v1(83.688,51.855) 84.986,51.855 ; v1(85.375,77.287) 85.375,69.938 84.986,69.549 84.986,51.855 ; v1(86.25,46.48) 84.986,47.744 84.986,51.855 ; v1(90.562,41.063) v1(90.562,46.48) ; v1(92.375,6.813) 92.375,9.562 93.928,11.115 93.928,38.197 93.5,38.625 v1(93.5,41.063) ; v1@93.927,41.063 v1@93.927,41.105
  Bottom Layer w0.254: D3_4.1@89.188,44.815 89.188,46.48
  Bottom Layer w0.381: R8_4.2@83.688,50.242 v1(83.688,51.855) R64.1@83.688,53.417 ; v1(85.375,77.287) R114.1@85.375,79.087 ; R63.2@86.625,48.342 86.625,46.855 v1(86.25,46.48) 88.812,46.48 ; R144_4.1@88.805,48.342 88.805,46.487 88.812,46.48 ; v1(90.562,41.063) 92,41.063 ; C17_4.1@92,42.717 92,41.063 ; R9_4.2@92,47.905 92,47.23 91.25,46.48 v1(90.562,46.48) 89.188,46.48 88.812,46.48 ; v1(92.375,6.813) 95.812,6.813 SW3_4.3@95.812,4.45 ; v1(93.5,41.063) 92,41.063
NetC17_4_2: C17_4.2 D4_4.1 R9_4.1 R10_4.2 R65.2 R66.1 R118.1 R147_4.1 SW3_4.6 | length 107
  Top Layer w0.381: v1(93.875,1.25) 93.875,8.411 93.892,8.428 93.892,9.205 95.312,10.625 95.312,45.042 v1(93.875,46.48) v1(93.875,51.855) ; v1(93.875,57.687) v1(93.875,77.287) ; v1(97.688,46.48) 97.688,49.23 v1(100.312,51.855)
  Bottom Layer w0.254: D4_4.1@94.813,44.815 94.813,46.48
  Bottom Layer w0.381: C17_4.2@92,45.055 92,45.73 92.75,46.48 v1(93.875,46.48) 94.813,46.48 95.563,46.48 ; R9_4.1@92,50.242 92,51.855 v1(93.875,51.855) v1(93.875,57.687) ; v1(93.875,1.25) 94.375,0.75 95.812,0.75 SW3_4.6@95.812,2.05 ; v1(93.875,77.287) R118.1@93.875,79.087 ; 95.563,47.592 95.563,46.48 ; R65.2@97.688,48.342 v1(97.688,46.48) 95.563,46.48 ; R10_4.2@100.312,50.242 v1(100.312,51.855) R66.1@100.312,53.48
NetC17_5_1: C17_5.1 D3_5.1 R8_5.2 R9_5.2 R67.2 R68.1 R125.1 R144_5.1 SW3_5.3 | length 100.8
  Top Layer w0.381: v1(109.875,51.855) 111.174,51.855 ; v1(111.174,77.287) 111.174,51.855 ; v1(112.437,46.48) 111.174,47.744 111.174,51.855 ; v1(116.75,41.063) v1(116.75,46.48) ; v1(118.562,6.813) 118.562,9.562 120.115,11.115 120.115,38.197 119.688,38.625 v1(119.688,41.063) ; v1@120.115,41.063 v1@120.115,41.105
  Bottom Layer w0.254: D3_5.1@115.375,44.815 115.375,46.48
  Bottom Layer w0.381: R8_5.2@109.875,50.242 v1(109.875,51.855) R68.1@109.875,53.417 ; v1(111.174,77.287) R125.1@111.174,79.087 ; R67.2@112.812,48.342 112.812,46.855 v1(112.437,46.48) 115,46.48 ; R144_5.1@114.992,48.342 114.992,46.487 115,46.48 ; v1(116.75,41.063) 118.187,41.063 ; C17_5.1@118.187,42.717 118.187,41.063 ; R9_5.2@118.187,47.905 118.187,47.23 117.437,46.48 v1(116.75,46.48) 115.375,46.48 115,46.48 ; v1(118.562,6.813) 122,6.813 SW3_5.3@122,4.45 ; v1(119.688,41.063) 118.187,41.063
NetC17_5_2: C17_5.2 D4_5.1 R9_5.1 R10_5.2 R69.2 R70.1 R129.1 R147_5.1 SW3_5.6 | length 107
  Top Layer w0.381: v1@120.049,77.264 120.049,71.076 120.062,71.062 v1(120.062,57.687) ; v1(120.062,1.25) 120.062,8.411 120.079,8.428 120.079,9.205 121.5,10.625 121.5,45.042 v1(120.062,46.48) v1(120.062,51.855) ; v1(123.875,46.48) 123.875,49.23 v1(126.5,51.855)
  Bottom Layer w0.254: D4_5.1@121,44.815 121,46.48
  Bottom Layer w0.381: C17_5.2@118.187,45.055 118.187,45.73 118.937,46.48 v1(120.062,46.48) 121,46.48 121.75,46.48 ; R9_5.1@118.187,50.242 118.187,51.855 v1(120.062,51.855) v1(120.062,57.687) ; v1(120.049,77.287) R129.1@120.049,79.087 ; v1(120.062,1.25) 120.562,0.75 122,0.75 SW3_5.6@122,2.05 ; 121.75,47.592 121.75,46.48 ; R69.2@123.875,48.342 v1(123.875,46.48) 121.75,46.48 ; R10_5.2@126.5,50.242 v1(126.5,51.855) R70.1@126.5,53.48
NetC17_6_1: C17_6.1 D3_6.1 R8_6.2 R9_6.2 R71.2 R72.1 R136.1 R144_6.1 SW3_6.3 | length 100.9
  Top Layer w0.381: v1(136.062,51.855) 137.438,51.855 ; v1(137.438,77.287) 137.438,51.855 ; v1(138.625,46.48) 137.438,47.667 137.438,51.855 ; v1(142.937,41.063) v1(142.937,46.48) ; v1(144.75,6.813) 144.75,9.562 146.302,11.115 146.302,38.197 145.875,38.625 v1(145.875,41.063) ; v1@146.302,41.063 v1@146.302,41.105
  Bottom Layer w0.254: D3_6.1@141.563,44.815 141.562,46.48
  Bottom Layer w0.381: R8_6.2@136.063,50.242 v1(136.062,51.855) R72.1@136.062,53.417 ; v1(137.438,77.287) R136.1@137.438,79.112 ; R71.2@139,48.362 139,46.855 v1(138.625,46.48) 141.187,46.48 ; R144_6.1@141.18,48.342 141.18,46.487 141.187,46.48 ; v1(142.937,41.063) 144.375,41.063 ; C17_6.1@144.375,42.717 144.375,41.063 ; R9_6.2@144.375,47.905 144.375,47.23 143.625,46.48 v1(142.937,46.48) 141.562,46.48 141.187,46.48 ; v1(144.75,6.813) 148.187,6.813 SW3_6.3@148.187,4.45 ; v1(145.875,41.063) 144.375,41.063